# EAGLE board sensor_node_top_layer (EAGLE 9.6.0)
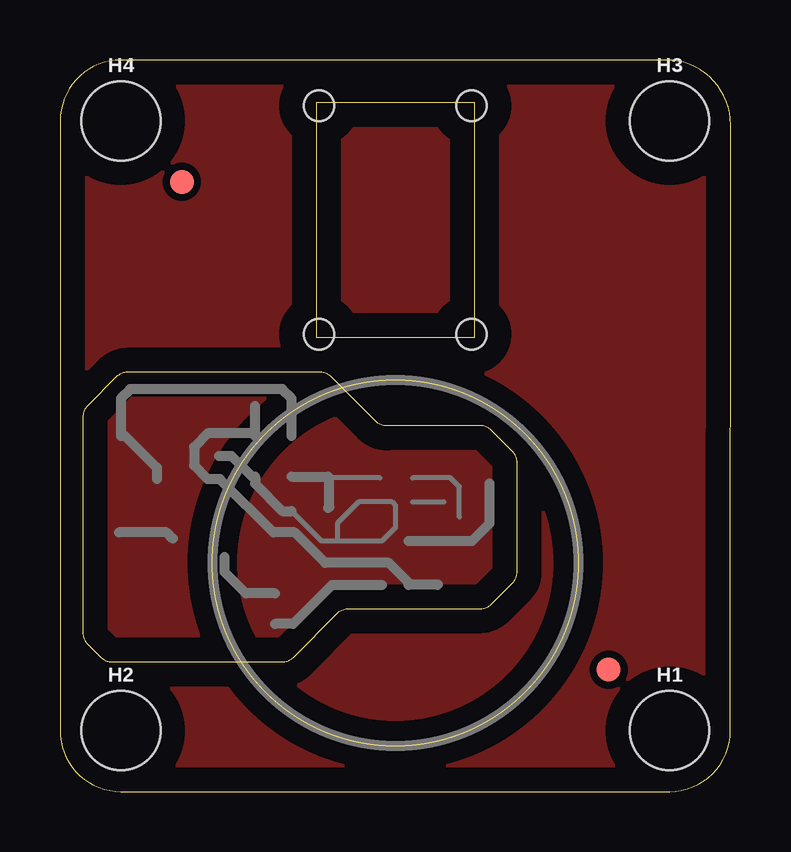
[diagram p0: board, top side]
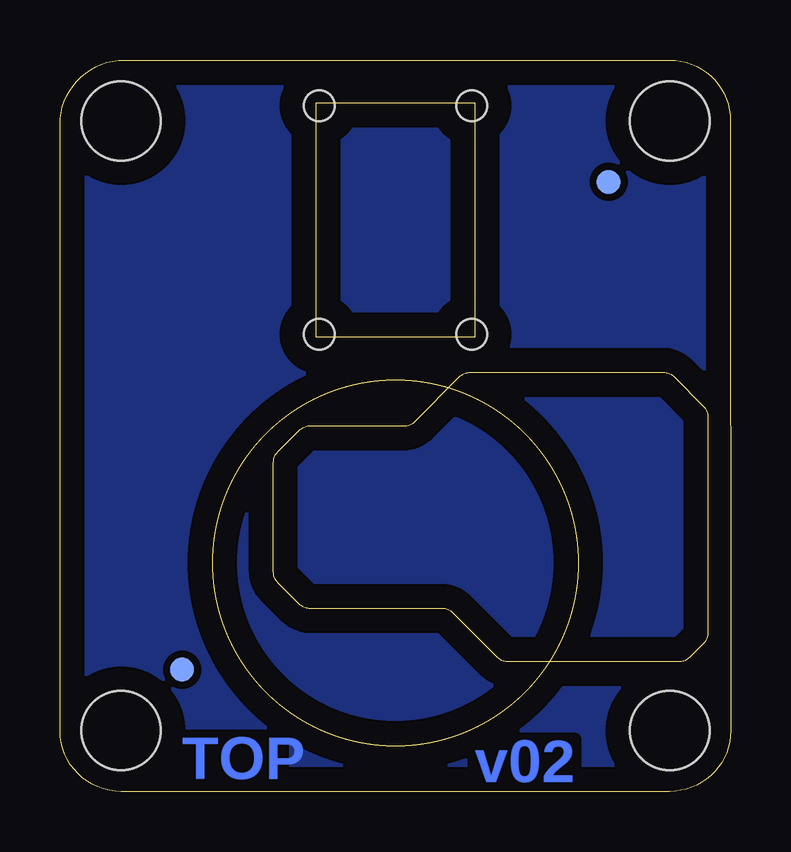
[diagram p1: board, bottom side, seen from below]

Size 27.94 x 30.48 mm. Coordinates in mm from the lower left corner, seen from the top.
Outline: 0.01,27.95 0,2.54 arc90 2.54,0 25.4,0 arc90 27.94,2.53 27.94,27.79 arc90 25.26,30.48 2.54,30.48 arc90 0.01,27.95
Outline: 10.67,28.7 10.67,18.92 17.27,18.92 17.27,28.7 10.67,28.7
Outline: 2.17,5.4 9.26,5.4 arc45 9.71,5.58 11.56,7.43 arc-45 12.01,7.62 17.52,7.62 arc45 17.97,7.81 18.86,8.7 arc45 19.05,9.15 19.05,13.71 arc45 18.86,14.16 17.97,15.05 arc45 17.52,15.24 13.6,15.24 arc-45 13.15,15.43 11.3,17.28 arc45 10.85,17.46 2.8,17.46 arc45 2.35,17.28 1.14,16.06 arc45 0.95,15.61 0.95,6.61 arc45 1.14,6.16 1.72,5.58 arc45 2.17,5.4
Outline: circle at 13.97,9.53 radius 7.62
Copper layers (1*16): Top 0.035mm / dielectric 1.5mm / Bottom 0.035mm
Design rules "default": minimum track width 6mil, minimum drill 0.35mm, track to track 6mil, track to pad 6mil, pad to pad 6mil, via to via 6mil, smd to smd 6mil, copper to edge 40mil, drill to drill 6mil, minimum pad ring 10mil, minimum via ring 8mil, stop-mask expansion 4mil, vias tented up to drill 0mil, thermal gap 10mil
Holes 1.27 mm at 10.79,28.57 17.14,28.57 10.79,19.05 17.14,19.05

## Footprints (pad centres in the part's own frame; a part is rotated, then mirrored left to right if it is on the bottom)
FIDUCIAL-1X2 = smd 1 x 1: 1 0,0
STAND-OFF = hole 3.302: 0,0

## Placement (x,y rotation side)
FD1  FIDUCIAL1X2  [FIDUCIAL-1X2]  5.08,25.4 0 top
FD2  FIDUCIAL1X2  [FIDUCIAL-1X2]  22.86,5.08 0 top
FD3  FIDUCIAL1X2  [FIDUCIAL-1X2]  5.08,25.4 0 bottom
FD4  FIDUCIAL1X2  [FIDUCIAL-1X2]  22.86,5.08 0 bottom
H1  STAND-OFF  [STAND-OFF]  25.4,2.54 0 top
H2  STAND-OFF  [STAND-OFF]  2.54,2.54 0 top
H3  STAND-OFF  [STAND-OFF]  25.4,27.94 0 top
H4  STAND-OFF  [STAND-OFF]  2.54,27.94 0 top

## Library data of the parts
FD1-FD4 = SparkFun-Aesthetics
H1-H4 = SparkFun-Hardware

## Tracks (layer width: path | path; a pad name or v marks a point on that pad's centre or on a via)
GND
  pour Bottom (isolate 0.305): 25.4,0 2.54,0 arc-90 0,2.54 0,27.94 arc-90 2.54,30.48 25.4,30.48 arc-90 27.94,27.94 27.94,2.54 arc-90
  pour Top (isolate 0.305): 25.4,0 2.54,0 arc-90 0,2.54 0,27.94 arc-90 2.54,30.48 25.4,30.48 arc-90 27.94,27.94 27.94,2.54 arc-90

## Text on the board
Bottom: TOP | v02